# Altium PCB MCU099_MSPM0L1306_PCB.PcbDoc (part 2 of 5)
Units mil, origin at the board's own origin, x right, y up, seen from the top; angles counter-clockwise.
Board outline 2310.03 x 3906.03 mil, 4 copper layers (Top Layer, VCC Layer, GND Layer, Bottom Layer), stack 62.4 mil thick; 211 components, 124 nets, 674 pads, 192 vias.
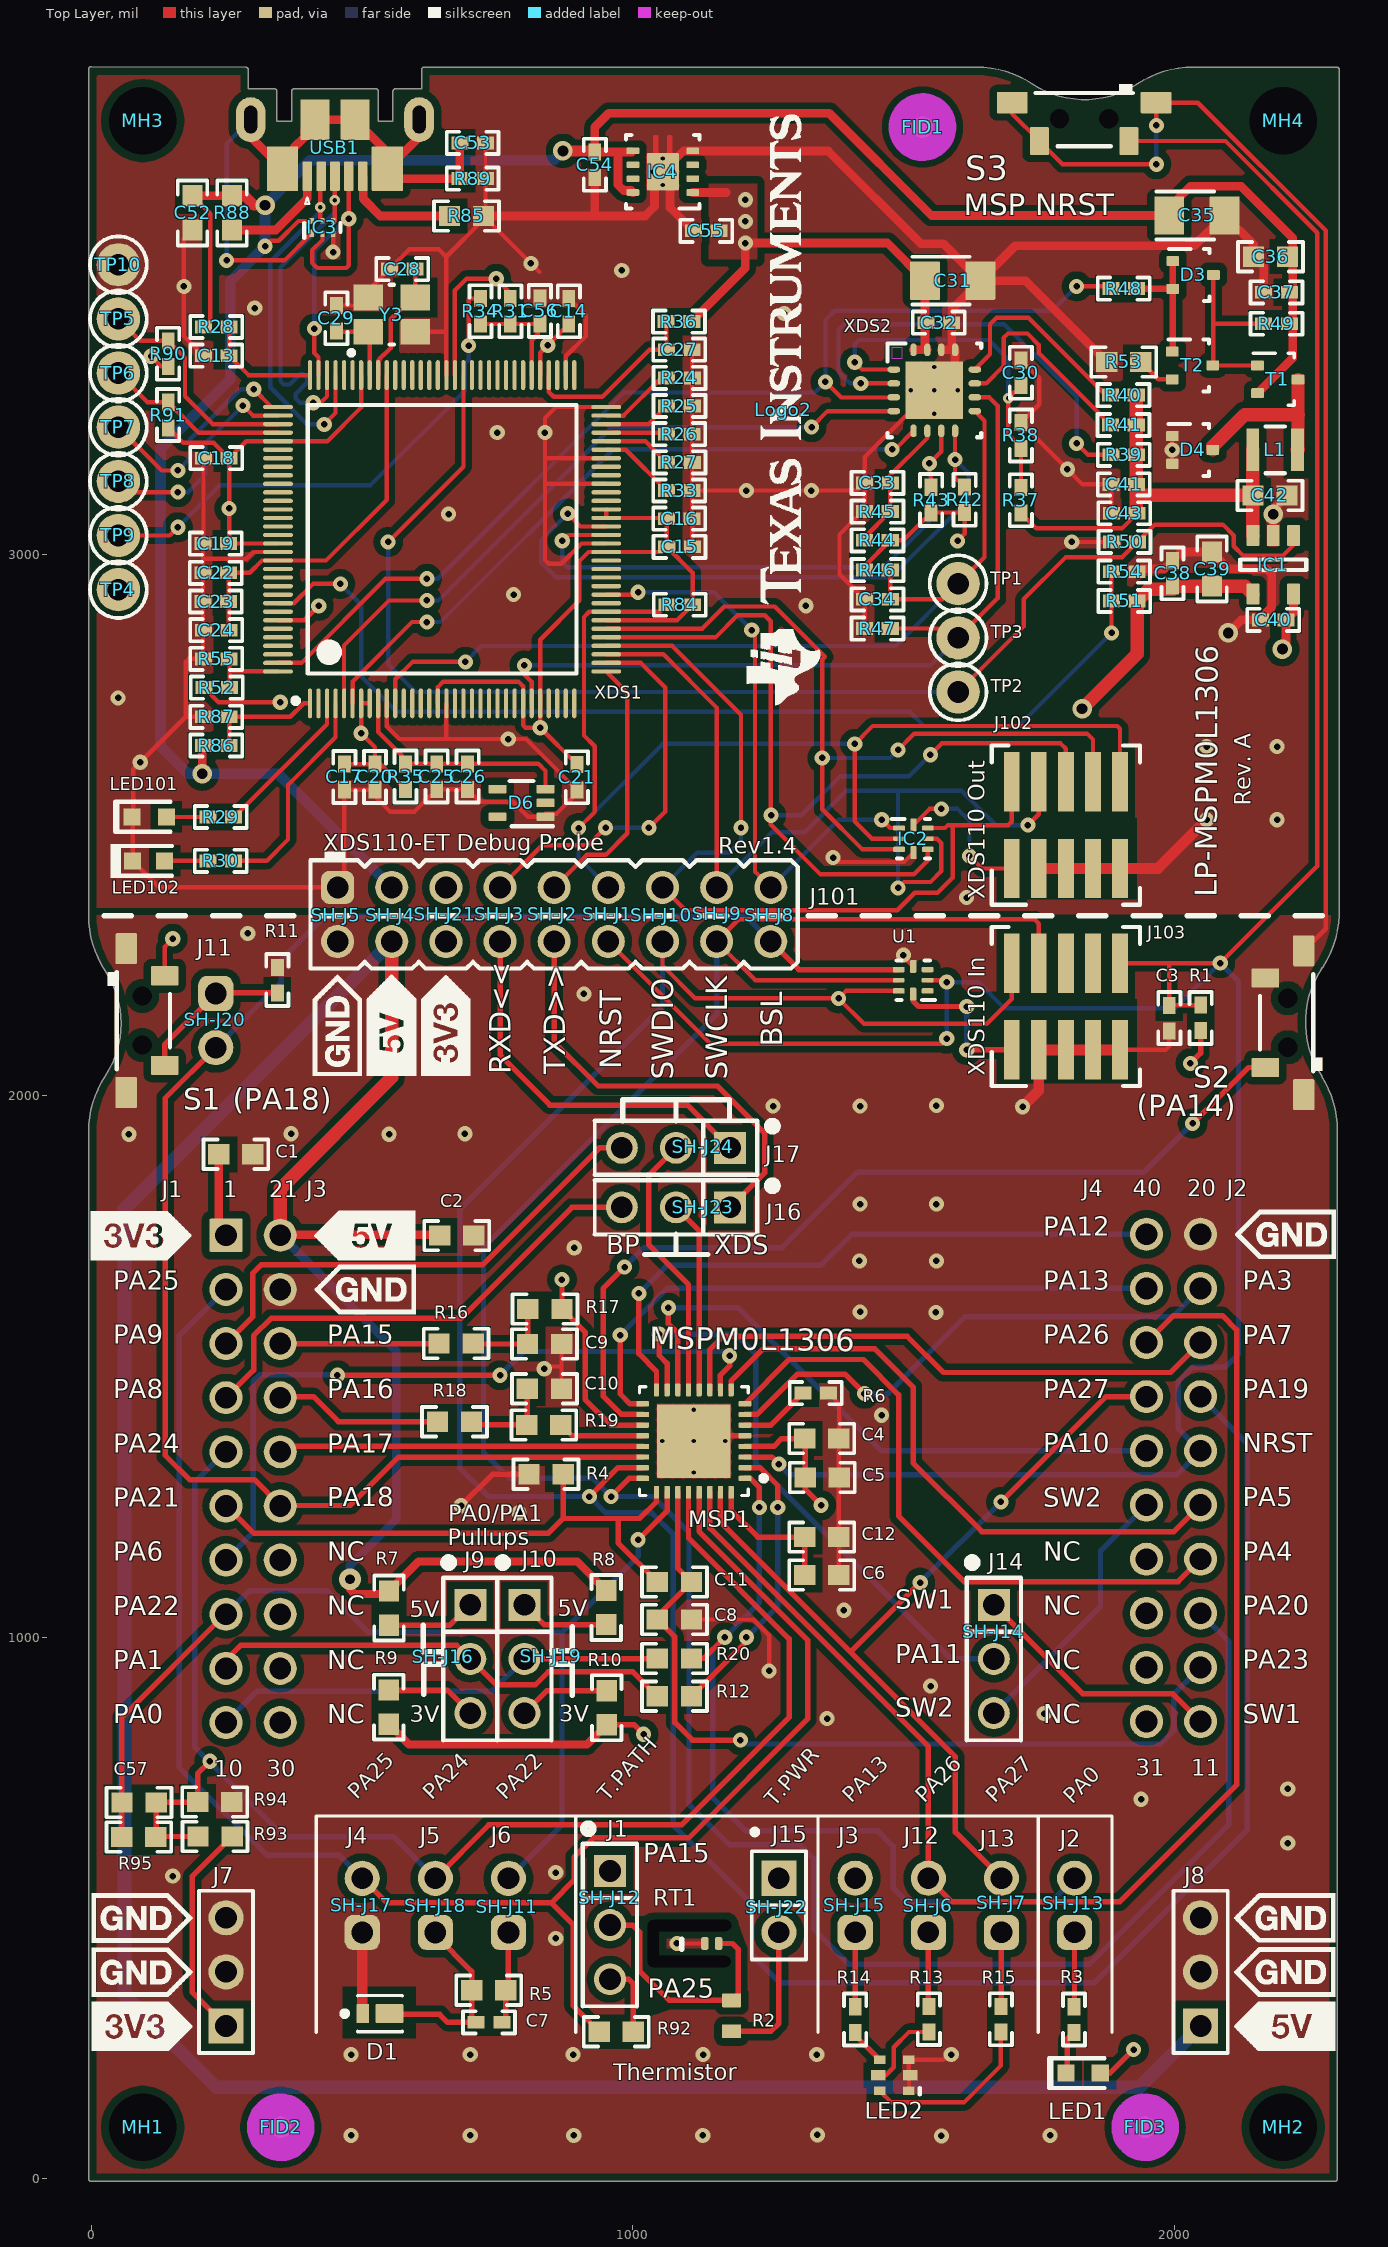
[diagram p0: Top Layer view]

## Part data (continued)
C30 C33: library part CMP-0006454-1, "CAP, CERM, 33 pF, 50 V, +/- 5%, C0G/NP0, 0402", Cap_Case=0402, Manufacturer=MuRata, Supplier Part Number 1=81-GRM1555C1H330JA1D, TempCo=C0G/NP0, Tolerance_%=5%, Value1=Unknown, Value2=50V, ValueDisplayed=33pF, AEC Category=Q200, AEC Qualified=?, Cap_F=33pF, ComponentLink1Description="Datasheet link", ComponentLink1URL=http://search.murata.co.jp/Ceramy/PnsearchViewAction.do?HnOFG=ON&HnNFG=ON&SEL_CNT=50&sLang=en&sKey=GRM1555C1H330JA01D&x=9&y=9&search=startwith, CompType=Capacitor, LatestRevisionDate=2017-03-09, MountType=SMT, PackageReference=0402, PartNumber=GRM1555C1H330JA01D, Polarized=N, Published=2008-06-19, Publisher="Texas Instruments", RoHS=Y, SizeArea_mm2=0.5, SizeAreaWB_mm2=3, SizeX_mm=1, SizeY_mm=0.5, SizeZ_mm=0.6, Supplier 1=Mouser, TaMax_C=125°C, TaMin_C=-55°C, Technology=Ceramic, U/M=EA, VDC_V=50V
C31 C35: library part CMP-0011480-1, "CAP, TA, 4.7 uF, 16 V, +/- 10%, 4 ohm, SMD", Cap_Case=3216-18, Manufacturer=AVX, Supplier Part Number 1=478-3868-1-ND, Tolerance_%=10%, Value1="4 ohm", Value2=16V, ValueDisplayed=4.7uF, AEC Category=Q200, AEC Grade=N/A, AEC Qualified=N, Cap_F=4.7µF, ComponentLink1Description="Datasheet link", ComponentLink1URL=http://www.avx.com/docs/Catalogs/taj.pdf, CompType=Capacitor, ESR_ohm=4, LatestRevisionDate=2017-03-09, LatestRevisionNote="Updated supplier links", MountType=SMT, PackageReference=3216-18, PartNumber=TAJA475K016RNJ, Polarized=Y, Publisher="Texas Instruments", RoHS=Y, Series=TAJ, SizeArea_mm2=5.12, SizeAreaWB_mm2=10.92, SizeX_mm=3.2, SizeY_mm=1.6, SizeZ_mm=1.8, Supplier 1=Digi-Key, Supplier 2=Newark, Supplier 3=Mouser, Supplier Part Number 2=60R5857, Supplier Part Number 3=581-TAJA475K016R, TaMax_C=125°C, TaMin_C=-55°C, Technology=TA, U/M=EA, VDC_V=16V
C34: library part CMP-0006529-2, "CAP, CERM, 1000 pF, 6.3 V, +/- 10%, X5R, 0402", Cap_Case=0402, Manufacturer=MuRata, Supplier Part Number 1=GRM155R60J102KA01D-ND, TempCo=X5R, Tolerance_%=10%, Value1=Unknown, Value2=6.3V, ValueDisplayed=1000pF, AEC Category=Q200, AEC Qualified=?, Cap_F=1nF, ComponentLink1Description="Datasheet link", ComponentLink1URL=http://search.murata.co.jp/Ceramy/PnsearchViewAction.do?HnOFG=ON&HnNFG=ON&SEL_CNT=50&sLang=en&sKey=GRM155R60J102KA01D&x=9&y=9&search=startwith, CompType=Capacitor, LatestRevisionDate=2017-03-09, MountType=SMT, PackageReference=0402, PartNumber=GRM155R60J102KA01D, Polarized=N, Published=2008-06-19, Publisher="Texas Instruments", RoHS=Y, SizeArea_mm2=0.5, SizeAreaWB_mm2=3, SizeX_mm=1, SizeY_mm=0.5, SizeZ_mm=0.6, Supplier 1=Digi-Key, Supplier 2=Mouser, Supplier Part Number 2=81-GRM155R60J102KA1D, TaMax_C=85°C, TaMin_C=-55°C, Technology=Ceramic, U/M=EA, VDC_V=6.3V
C36 C42: library part CMP-0007341-4, "CAP, CERM, 4.7 uF, 16 V, +/- 10%, X5R, 0603", Cap_Case=0603, Manufacturer=MuRata, Supplier Part Number 1=490-10481-1-ND, TempCo=X5R, Tolerance_%=10%, Value1=Unknown, Value2=16V, ValueDisplayed=4.7uF, AEC Category=Q200, AEC Grade=N/A, AEC Qualified=N, Cap_F=4.7µF, ComponentLink1Description="Datasheet link", ComponentLink1URL=http://psearch.murata.com/capacitor/product/GRM188R61C475KAAJ%23.pdf, CompType=Capacitor, LatestRevisionDate=2017-03-09, MountType=SMT, PackageReference=0603, PartNumber=GRM188R61C475KAAJ, Polarized=N, Published=2008-06-19, Publisher="Texas Instruments", RoHS=Y, SizeArea_mm2=1.28, SizeAreaWB_mm2=4.68, SizeX_mm=1.6, SizeY_mm=0.8, SizeZ_mm=1, Supplier 1=Digi-Key, Supplier 2=Mouser, Supplier Part Number 2=81-GRM188R61C475KAJD, TaMax_C=85°C, TaMin_C=-55°C, Technology=Ceramic, U/M=EA, VDC_V=16V
C39: library part CMP-0007313-1, "CAP, CERM, 47 uF, 6.3 V, +/- 20%, X5R, 0603", Cap_Case=0603, Manufacturer=MuRata, TempCo=X5R, Tolerance_%=20%, Value1=Unknown, Value2=6.3V, ValueDisplayed=47uF, AEC Category=Q200, AEC Qualified=?, Cap_F=47µF, ComponentLink1Description="Datasheet link", ComponentLink1URL=http://psearch.en.murata.com/capacitor/product/GRM188R60J476ME15%23.pdf, CompType=Capacitor, LatestRevisionDate=2017-03-09, MountType=SMT, PackageReference=0603, PartNumber=GRM188R60J476ME15D, Polarized=N, Published=2008-06-19, Publisher="Texas Instruments", RoHS=Y, SizeArea_mm2=1.28, SizeAreaWB_mm2=4.68, SizeX_mm=1.6, SizeY_mm=0.8, SizeZ_mm=1, TaMax_C=85°C, TaMin_C=-55°C, Technology=Ceramic, U/M=EA, VDC_V=6.3V
C40 C41: library part CMP-0006648-1, "CAP, CERM, 0.22 uF, 16 V, +/- 10%, X7R, 0402", Cap_Case=0402, Manufacturer=MuRata, Supplier Part Number 1=490-5418-1-ND, TempCo=X7R, Tolerance_%=10%, Value1=Unknown, Value2=16V, ValueDisplayed=0.22uF, AEC Category=Q200, AEC Qualified=?, Cap_F=220nF, ComponentLink1Description="Datasheet link", ComponentLink1URL=http://search.murata.co.jp/Ceramy/PnsearchViewAction.do?HnOFG=ON&HnNFG=ON&SEL_CNT=50&sLang=en&sKey=GRM155R71C224KA12D&x=9&y=9&search=startwith, CompType=Capacitor, LatestRevisionDate=2017-03-09, MountType=SMT, PackageReference=0402, PartNumber=GRM155R71C224KA12D, Polarized=N, Published=2008-06-19, Publisher="Texas Instruments", RoHS=Y, SizeArea_mm2=0.5, SizeAreaWB_mm2=3, SizeX_mm=1, SizeY_mm=0.5, SizeZ_mm=0.6, Supplier 1=Digi-Key, Supplier 2=Mouser, Supplier Part Number 2=81-GRM155R71C224KA2D, TaMax_C=125°C, TaMin_C=-55°C, Technology=Ceramic, U/M=EA, VDC_V=16V
C53: library part CMP-0006688-2, "CAP, CERM, 3300 pF, 50 V, +/- 10%, X7R, 0402", Cap_Case=0402, Manufacturer=MuRata, Supplier Part Number 1=490-3248-1-ND, TempCo=X7R, Tolerance_%=10%, Value1=Unknown, Value2=50V, ValueDisplayed=3300pF, AEC Category=Q200, AEC Qualified=?, Cap_F=3.3nF, ComponentLink1Description="Datasheet link", ComponentLink1URL=http://search.murata.co.jp/Ceramy/PnsearchViewAction.do?HnOFG=ON&HnNFG=ON&SEL_CNT=50&sLang=en&sKey=GRM155R71H332KA01D&x=9&y=9&search=startwith, CompType=Capacitor, LatestRevisionDate=2017-03-09, MountType=SMT, PackageReference=0402, PartNumber=GRM155R71H332KA01D, Polarized=N, Published=2008-06-19, Publisher="Texas Instruments", RoHS=Y, SizeArea_mm2=0.5, SizeAreaWB_mm2=3, SizeX_mm=1, SizeY_mm=0.5, SizeZ_mm=0.6, Supplier 1=Digi-Key, Supplier 2=Mouser, Supplier Part Number 2=81-GRM36X332K50, TaMax_C=125°C, TaMin_C=-55°C, Technology=Ceramic, U/M=EA, VDC_V=50V
C56: library part CMP-0078241-1, "CAP, CERM, 0.1 µF, 10 V,+/- 10%, X7R, 0402", Cap_Case=0402, Manufacturer=Kemet, Supplier Part Number 1=399-3520-1-ND, TempCo=X7R, Tolerance_%=10%, Value2=10V, ValueDisplayed=0.1µF, AEC Category=Q200, AEC Grade=N/A, AEC Qualified=N, Cap_F=100nF, ComponentLink1Description="Datasheet link", ComponentLink1URL=https://content.kemet.com/datasheets/KEM_C1002_X7R_SMD.pdf, CompType=Capacitor, MountType=SMT, PackageReference=0402, PartNumber=C0402C104K8RACTU, Polarized=N, RoHS=Y, SizeArea_mm2=0.5, SizeAreaWB_mm2=3, SizeX_mm=1, SizeY_mm=0.5, SizeZ_mm=0.6, Supplier 1=Digi-Key, Supplier 2=Newark, Supplier 3=Mouser, Supplier Part Number 2=68X2393, Supplier Part Number 3=80-C0402C104K8R, TaMax_C=125°C, TaMin_C=-55°C, Technology=Ceramic, U/M=EA, VDC_V=10V
D1: library part CMP-0093192-1, "Photodiode PIN Chip 910nm Automotive 2-Pin Case 0805(2012Metric) T/R", Dark Current=0.001uA, Digikey Part Number=751-VEMD4110X01CT-ND, Forward Current=50mA, Manufacturer=Vishay, Mouser Part Number=78-VEMD4110X01, Operating Temperature Range="-40°C to +110°C", Reverse Breakdown Voltage=20V, AEC Grade="Grade 2", AEC Qualified=Yes, Angle=110°, ComponentLink1Description=Datasheet, ComponentLink1URL=https://www.vishay.com/docs/84910/vemd4110x01.pdf, datasheet=https://www.vishay.com/docs/84910/vemd4110x01.pdf, Datasheet Path=datasheets/Diode-VEMD4110X01.pdf, Digikey Description="PHOTO PIN DIODE IN LOW PROFILE 0", helpURL=https://upverter.com/upn/revision/01c27b98662013f0/, LambdaD=910nm, Lead Free=Yes, PackageReference=0805, Part Number=VEMD4110X01, PartNumber=VEMD4110X01, RoHS=TRUE, Sensor Output=Photodiode, SizeZ_mm=0.8mm, TaMax_C=+110°C, TaMin_C=-40°C, Vf_V=1.1V
D3 D4: library part CMP-0028883-1, "Diode, Schottky, 40 V, 0.12 A, AEC-Q101, SOT-323", Manufacturer=Nexperia, Supplier Part Number 1=568-7982-1-ND, Value1=0.12A, Value2=1V, AEC Category=Q101, AEC Qualified=Y, ComponentLink1Description="Datasheet link", ComponentLink1URL=http://www.nexperia.com/documents/data_sheet/BAS40_1PSXXSB4X_SER.pdf, CompType=Diode, Green_EU RoHS=Incomplete, Green_EU RoHS-2=Incomplete, Green_Lifecycle="Not Set", Green_REACh=Incomplete, Io_A=120mA, LatestRevisionDate=2017-05-08, MountType=SMT, PackageReference=SOT-323, PartNumber=BAS40-05W,115, Published=2008-06-26, Publisher="Texas Instruments", RoHS=Y, SizeArea_mm2=4.84, SizeAreaWB_mm2=10.24, SizeX_mm=2.2, SizeY_mm=2.2, SizeZ_mm=1.1, Supplier 1=Digi-Key, Supplier 2=Newark, Supplier 3=Mouser, Supplier Part Number 2=70R1987, Supplier Part Number 3=771-BAS40-05W115, TJmax_C=150°C, Type=Schottky, U/M=EA, Vf_V=1V, Vr_V=40V
D6: library part CMP-0032785-2, "Precision Micropower Shunt Voltage Reference, 0.2% accuracy, 2.5 V, 15 ppm / degC, 15 mA, -40 to 85 degC, 5-pin SC70 (DCK), Green (RoHS & no Sb/Br)", Manufacturer="Texas Instruments", PartNumber=LM4040C25IDCKR, Rating=Catalog, Temp Coeff(Max)(ppm/ degree C)=100, Temp Coeff(Typ)(ppm/ degree C)=15, AEC Category=Q200, AEC Qualified=N, Code_JEDEC=MO-203, ComponentLink1Description="Datasheet Link", ComponentLink1URL=http://www.ti.com/lit/ds/symlink/lm4040.pdf, ComponentLink2Description="Product Folder", ComponentLink2URL=http://www.ti.com/product/lm4040, ComponentLink3Description="Online Datasheet", ComponentLink3URL=http://www.ti.com/product/lm4040/datasheet, CompType=IC, DatasheetVersion=SLOS456K, Eco-Plan="Green (RoHS & no Sb/Br)", Initial Accuracy @ 25/deg C(%)=0.2, Iout/Iz(Max)(mA)=15, Min Iz for Regulation(uA)=75, MountType=SMT, PackageDescription=SOT-SC70-5, PackageReference=DCK0005A, PartId=1, RoHS=Y, SizeArea_mm2=4.2, SizeAreaWB_mm2=9.3, SizeX_mm=2.1, SizeY_mm=2.0, SizeZ_mm=1.1, SubFamily="Shunt Voltage Reference", VO(V)=2.5
FID1 FID2 FID3: library part CMP-0077181-1, "Fiducial mark.  There is nothing to buy or mount.", Manufacturer=N/A, ClassName=FiducialMark, CompType=Fiducial, MountType=N/A, PackageReference=N/A, PartNumber=N/A